# Altium PCB PCB1.PcbDoc
Units mil, origin at the board's own origin, x right, y up, seen from the top; angles counter-clockwise.
Board outline 2015 x 2815 mil, 2 copper layers (Top Layer, Bottom Layer); 33 components, 27 nets, 109 pads, 9 vias.
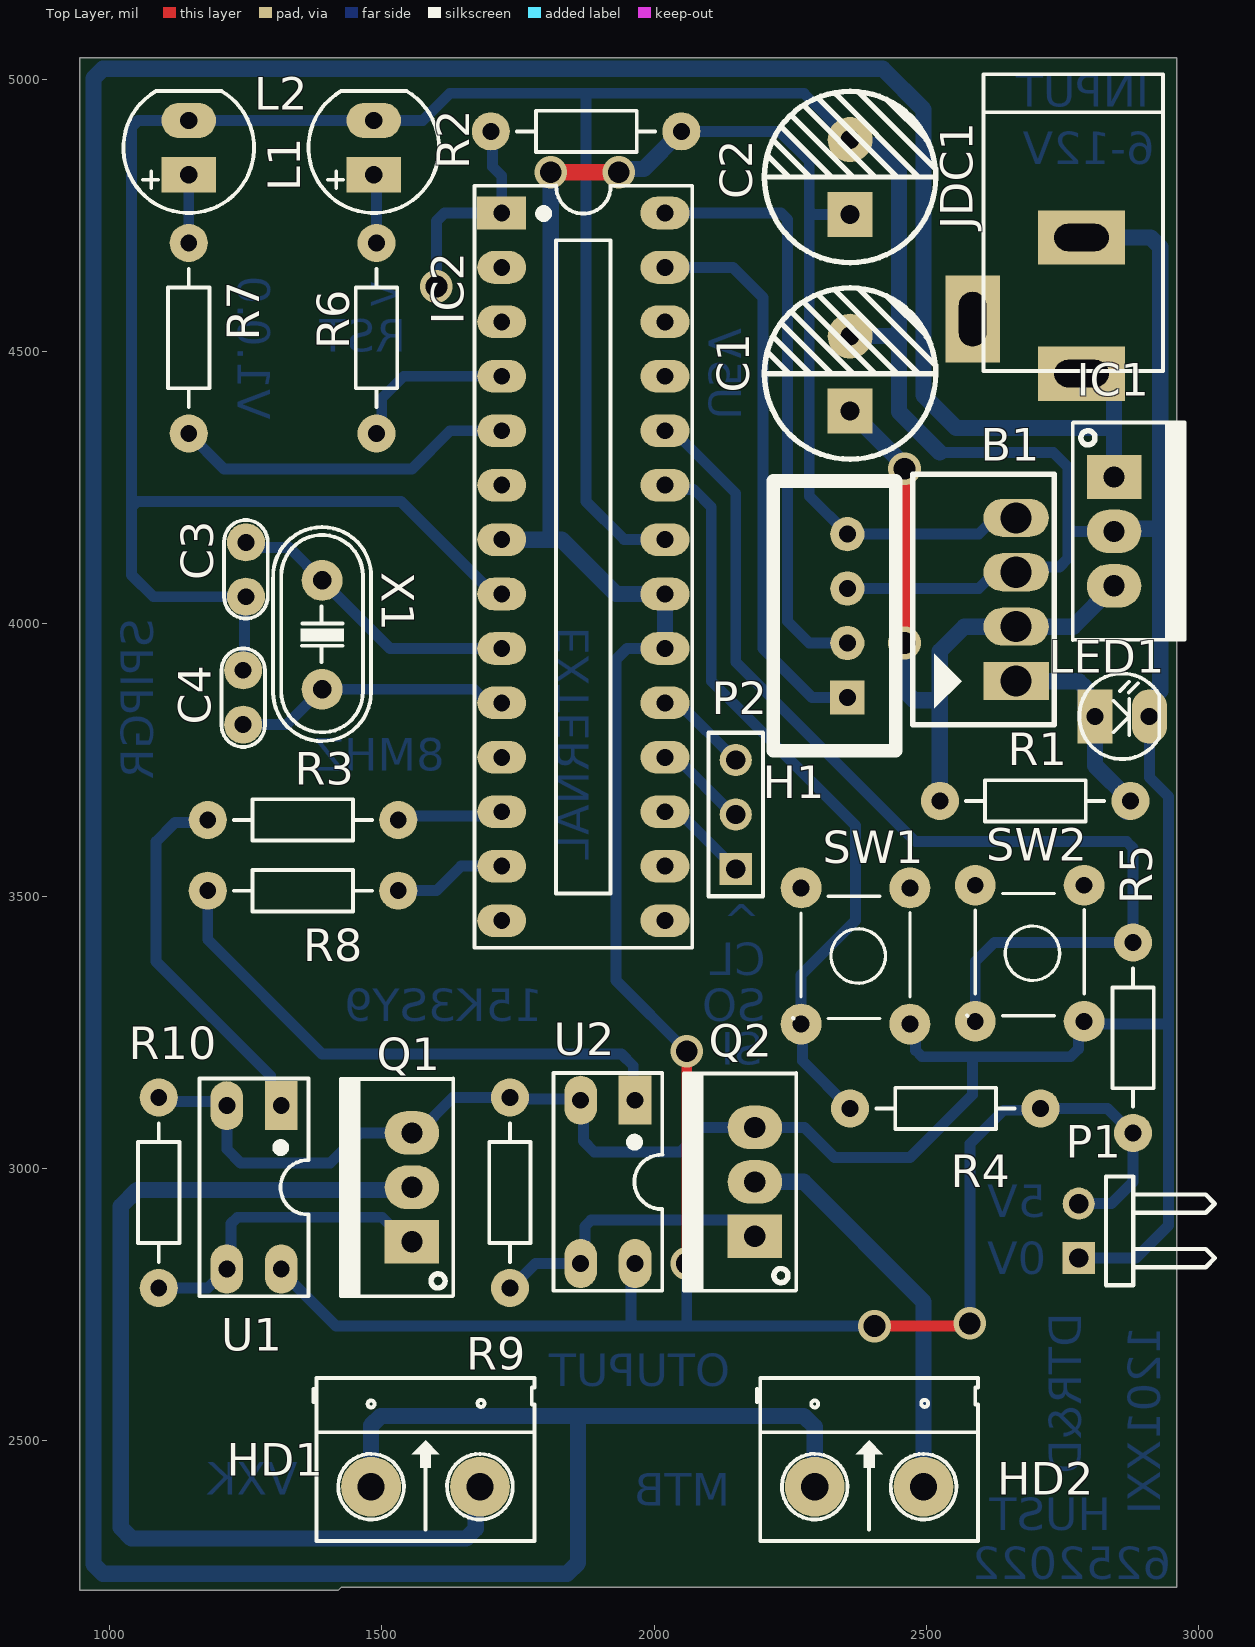
[diagram p0: Top Layer view]
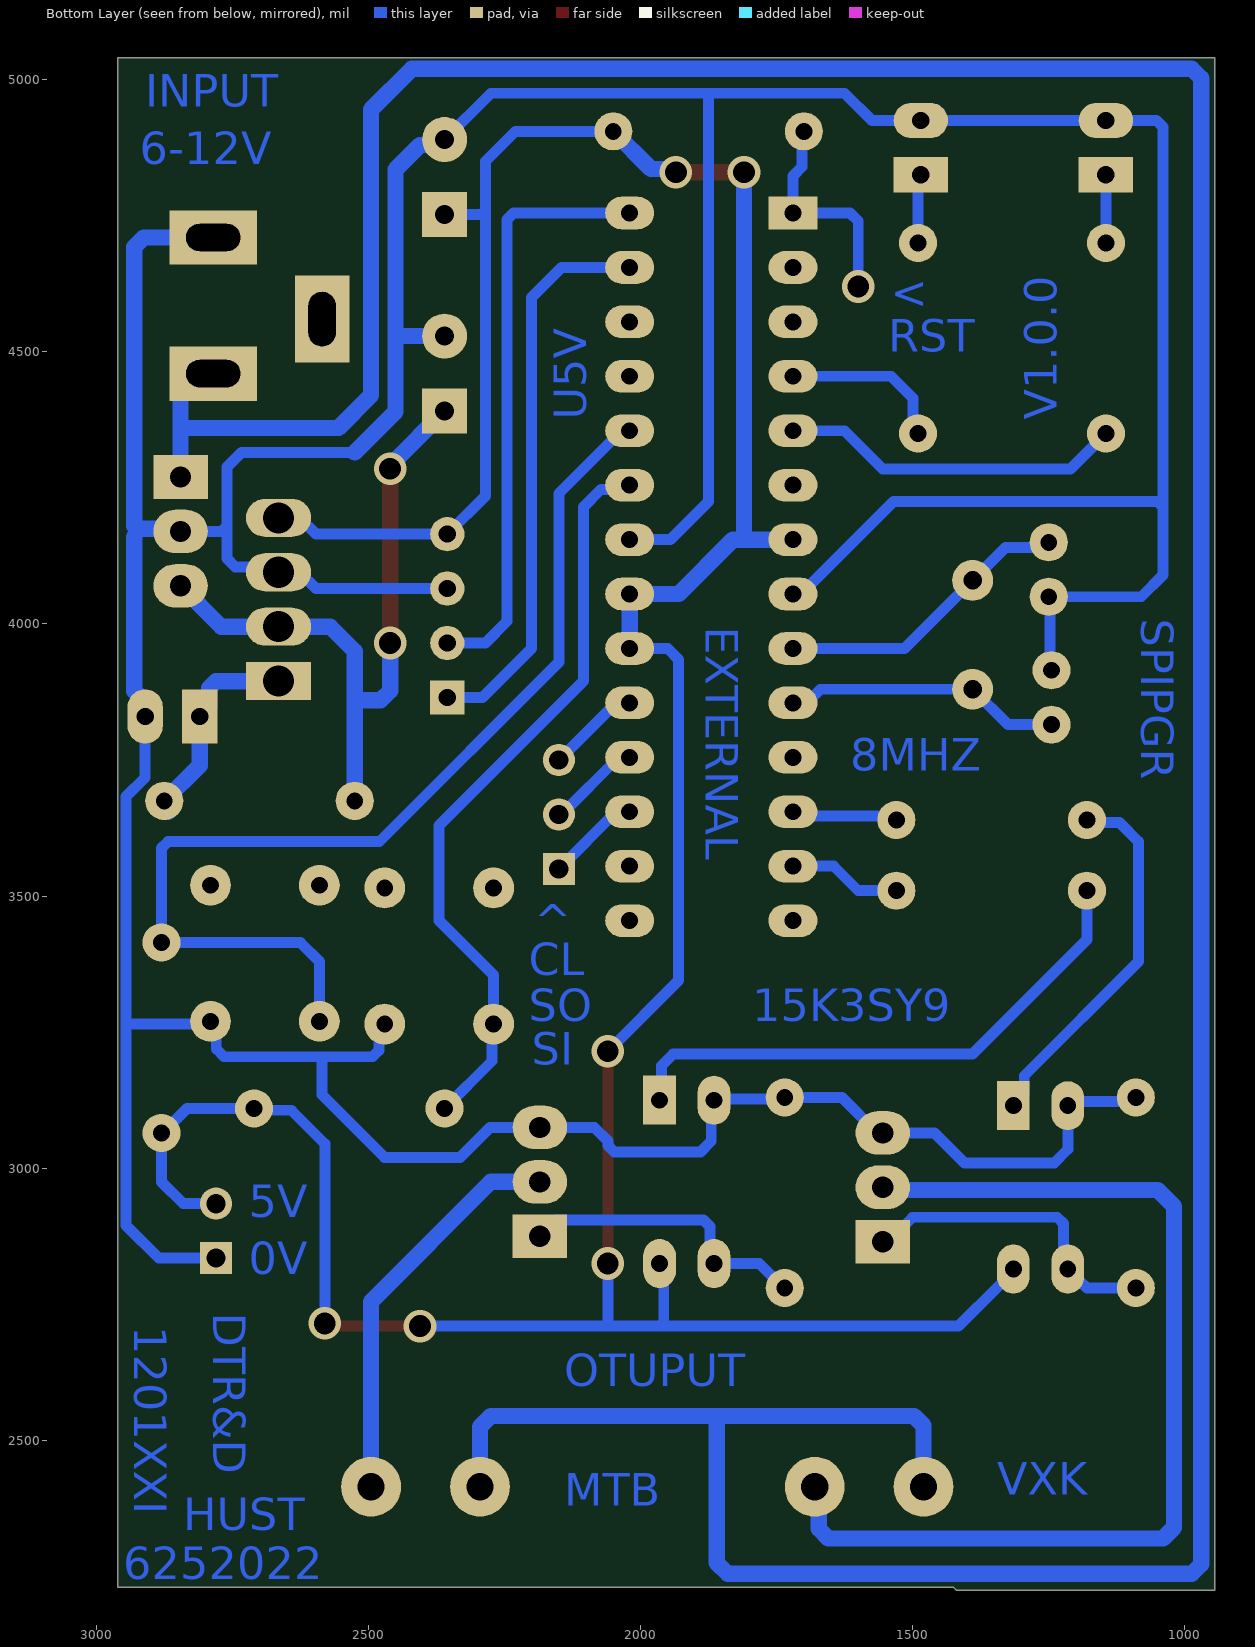
[diagram p1: Bottom Layer view, seen from below]
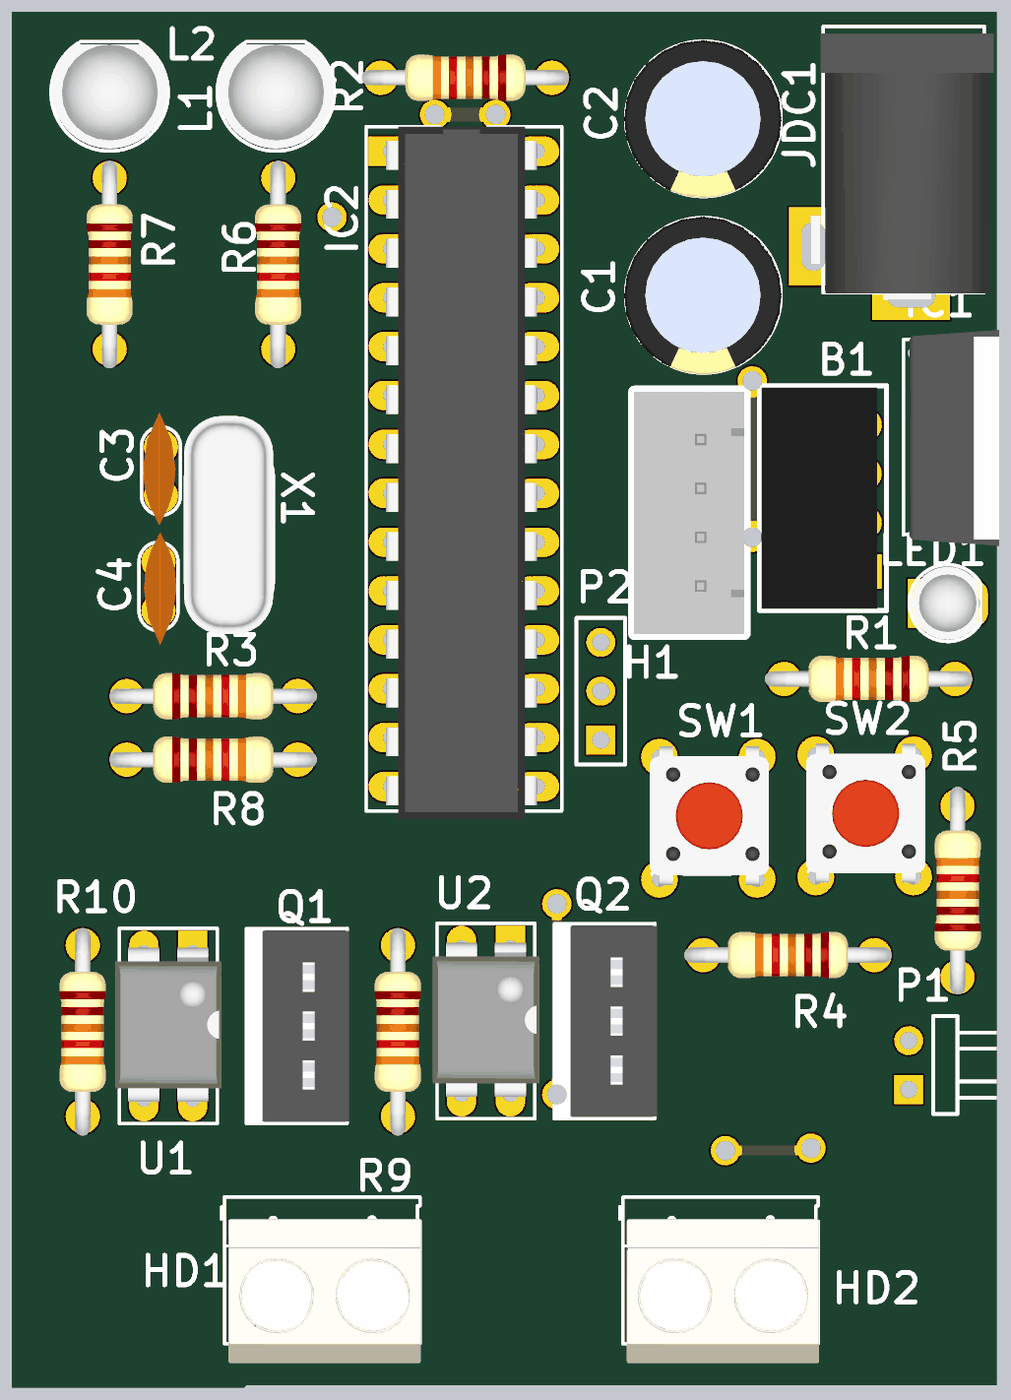
[diagram p2: 3D render of the assembled board from above, using the file's embedded part models]

## Layer stack, top to bottom
Top Solder: solder mask 0.4, Solder Resist, Dk 3.5
Top Layer: signal copper 1.4
Dielectric 1: dielectric 12.6, FR-4, Dk 4.8
Bottom Layer: signal copper 1.4
Bottom Solder: solder mask 0.4, Solder Resist, Dk 3.5

## Board outline
945,5040 2960,5040 2960,2230 1425,2230 1420,2225 945,2225

## Design rules (kind name [scope] priority, off if disabled: settings)
Clearance [All] p1: gap=10 ignorepadtopadclearanceinfootprint=FALSE except(0: Arc-Hole Track-Hole SMDPad-Hole THPad-Hole Via-Hole Fill-Hole Poly-Hole Region-Hole Text-Hole)
PolygonConnect [All] p1: connectstyle=Relief reliefconductorwidth=10 reliefentries=4 polygonreliefangle="90 Angle" airgapwidth=10
RoomDefinition Sheet2 [InComponentClass('Sheet2')] p1: confinementstyle=ConfineIn formatcopy=TRUE lockcomponents=FALSE outline 7045,1060 15470,1060 15470,2595 7045,2595
RoutingVias [All] p1: holewidth=28 width=50 viastyle="Through Hole" minholewidth=28 minwidth=50 maxholewidth=28 maxwidth=50
SolderMaskExpansion [All] p1: expansion=4 istentingtop=FALSE
Width [All] p1: maxlimit=30 minlimit=10 preferedwidth=20
30 further rules are at their usual default settings.

## Components (designator, comment, footprint, x,y, rotation, side; value= is the part's Value field where it differs from the comment)
B1 "B0505S" B0505S 2665,3895 r90 top
C1 "100uF" "tu hoa 8mm" 2360,4460 r90 top
C2 "100uF" "tu hoa 8mm" 2360,4821.1 r90 top
C3 "22pF" CN1 1250,4050 r90 top value=100pF
C4 "22pF" CN1 1245,3915 r270 top value=100pF
H1 "BMP170" XH2.54M-4 2355,3865 r90 top
HD1 "Header 2" HED2 1480,2415 r0 top
HD2 "Header 2" HED2 2295,2415 r0 top
IC1 "LM7805" QTO-220 2845,4270 r270 top
IC2 "ATmega8-L" DIP28/W0.3 1720,4755 r270 top
JDC1 "Jac DC" DC-IN 2685,4585 r270 top
L1 "LED 5mm" LED-5MM-RED 1485,4825 r90 top
L2 "LED 5mm" LED-5MM-RED 1145,4825 r90 top
LED1 "LED" LED-3 2810,3830 r0 top value="LED 3 ly Single Colour"
P1 "Header 2H" HDR1X2H 2780,2835 r90 top
P2 "Header 3" HDR1X3 2150,3550 r90 top
Q1 "IRF3709" TO220 1555,2865 r90 top
Q2 "IRF3709" TO220 2185,2875 r90 top
R1 "220R" R1/4W 2525,3675 r0 top value="R1/4W - 1K"
R2 "10K" R1/4W 1700,4905 r0 top value="R1/4W - 1K"
R3 "220R" R1/4W 1530,3640 r180 top value="R1/4W - 1K"
R4 "1k" R1/4W 2360,3110 r0 top value="R1/4W - 1K"
R5 "1k" R1/4W 2880,3415 r270 top value="R1/4W - 1K"
R6 "220R" R1/4W 1490,4350 r90 top value="R1/4W - 1K"
R7 "220R" R1/4W 1145,4350 r90 top value="R1/4W - 1K"
R8 "220R" R1/4W 1530,3510 r180 top value="R1/4W - 1K"
R9 "4k7" R1/4W 1735,2780 r90 top value="R1/4W - 1K"
R10 "4k7" R1/4W 1090,2780 r90 top value="R1/4W - 1K"
SW1 "SW" SW4 2470,3515 r270 top value="Button chip 4 pin"
SW2 "SW" SW4 2790,3520 r270 top value="Button chip 4 pin"
U1 "PC817" DIP4/W0.3 1315,3115 r180 top
U2 "PC817" DIP4/W0.3 1965,3125 r180 top
X1 "8Mhz" XT2 1390,3980 r270 top value=4Mhz

## Footprints (in the part's own frame and the unit in brackets; to place one, negate y for a bottom-side part, rotate by r counter-clockwise, add the part's x,y. Pads: shape width x height; smd on the part's side, far side on the other; paste and mask are expansions set on the pad)
B0505S [mil]
  rect 70x120 hole 57: 1(0,0)
  oval 70x120 hole 57: 2(100,0) 3(200,0) 4(300,0)
  silkscreen extent -80,-70 380,190, body extent -76,-50 376,186, height 394
CN1 [mil]
  round 70 hole 31: 1(0,0) 2(100,0)
  silkscreen extent -40,-40 141,40, body extent -60,-30 170,37, height 265
DC-IN [mil] "Jac DC input"
  rect 100x160 hole 50 slot 100 at 90 deg: 1(125,100) 2(-125,100)
  rect 160x100 hole 50 slot 100 at 0 deg: 3(25,-100)
  silkscreen extent -425,-80 120,250, body extent -410,-105 134,269, height 434
DIP4/W0.3 [mil] "4 PIN, W 300mil, Pin to pin 100mil"
  rect 60x90 hole 31: 1(0,0)
  oval 60x90 hole 31: 2(100,0) 3(100,300) 4(0,300)
  silkscreen extent -50,-50 150,350, body extent -59,-10 159,305, height 170
DIP28/W0.3 [mil] "28 PIN, W 300mil, Pin to pin 100mil"
  rect 60x90 hole 31: 1(0,0)
  oval 60x90 hole 31: 2(100,0) 3(200,0) 4(300,0) 5(400,0) 6(500,0) 7(600,0) 8(700,0) 9(800,0) 10(900,0) 11(1000,0) 12(1100,0) 13(1200,0) 14(1300,0) 15(1300,300) 16(1200,300) 17(1100,300) 18(1000,300) 19(900,300) 20(800,300) 21(700,300) 22(600,300) 23(500,300) 24(400,300) 25(300,300) 26(200,300) 27(100,300) 28(0,300)
  silkscreen extent -50,-50 1350,350, body extent -50,-10 1367,300, height 200
HDR1X2H [mm] "Connector; Header; 2 Position; Right Angle"
  rect 1.5x1.5 hole 0.9: 1(0,0)
  round 1.5 hole 0.9: 2(2.54,0)
  silkscreen extent -1.27,-6.35 3.81,-1.27
HDR1X3 [mm] "Connector; Header; 3 Position"
  rect 1.5x1.5 hole 0.9: 1(0,0)
  round 1.5 hole 0.9: 2(2.54,0) 3(5.08,0)
  silkscreen extent -1.27,-1.27 6.35,1.27
HED2 [mil] "Header 2, 2 pin, hight 300mil, Pin to Pin 200, Colour Green"
  round 110 hole 50: 1(0,0) 2(200,0)
  silkscreen extent -106,-100 300,200, body extent -92,-140 302,155, height 394
LED-3 [mil] "LED 2 PIN, 3ly Only colour"
  rect 65x100 hole 32: 1(0,0)
  oval 65x100 hole 32: 2(100,0)
  silkscreen extent -29,-78 118,79, body extent -25,-75 113,75, height 217
LED-5MM-RED [mil] "LED 2 PIN, 5 ly , Only colour,pin to pin 100mil"
  rect 65x100 hole 32: 1(0,0)
  oval 65x100 hole 32: 2(100,0)
  silkscreen extent -70,-120 154,120, body extent -65,-119 149,118, height 339
QTO-220 [mil] "TO-220 - 1-2-3"
  rect 80x100 hole 39: 1(0,0)
  oval 80x100 hole 39: 2(100,0) 3(200,0)
  silkscreen extent -100,-76 300,130, body extent -119,-64 322,121, height 755
R1/4W [mil] "R 1/4W, 2 Pin, 350mil"
  round 70 hole 31: 1(0,0) 2(350,0)
  silkscreen extent 48,-38 302,38, body extent -40,-47 386,47, height 111
SW4 [mil] "SW button 4pin, 250 x250 mil"
  round 75 hole 31: 1(0,0) 2(250,-200) 3(250,0) 4(0,-200)
  silkscreen extent 15,-215 240,0, body extent -36,-220 276,24, height 276
TO220 [mil] "TO-220"
  rect 80x100 hole 39: 1(0,0)
  oval 80x100 hole 39: 2(100,0) 3(200,0)
  silkscreen extent -100,-76 300,130, body extent -95,-80 295,97, height 323
"tu hoa 8mm" [mm]
  rect 2.1x2.1 hole 0.9: 1(-1.75,0)
  round 2.1 hole 0.9: 2(1.75,0)
  silkscreen extent -4,-4 4,4, body extent -4.1,-4.07 4.1,4.13, height 13.81
XH2.54M-4 [mm]
  rect 1.6x1.6 hole 0.8: 1(0,0)
  round 1.6 hole 0.8: 2(2.54,0) 3(5.08,0) 4(7.62,0)
  silkscreen extent -2.48,-2.26 10.1,3.46, body extent -2.48,-2.26 10.1,3.48, height 6.91
XT2 [mil] "Footpin for Crystal 2 pin"
  round 75 hole 34: 1(-100,0) 2(100,0)
  silkscreen extent -198,-90 195,90, body extent -233,-93 213,90, height 138

## Part data
B1: "Cắm", Chung_Loai=Cắm, Don_Vi=Con, Ma_Hang=MH003143, Ten_Linh_Kien="B0505S-1W SIP4 IC Converter DC-DC"
C1 C2: library part "Tu Hoa 100uF 35V 8x11", "Cắm", Chung_Loai=Cắm, Don_Vi=Con, Ma_Hang=MH002807, So_Chan=2, Ten_Linh_Kien="Tụ Hóa 100uF 35V 8x11MM"
C3 C4: library part CN1, "Cap np  1pF - 472pF"
H1: library part "Header 4P 2.54 Duc Thang", "Cắm", Chung_Loai=Cắm, Don_Vi=Con, Ma_Hang=MH001285, Ten_Linh_Kien="Header 4P XH2.54-4P Đực Thẳng"
HD1 HD2: library part Hed2, "Header 2 (Green)"
IC1: library part LM78xx, "On ap +, from + 5 to + 24VDC"
IC2: "8-Bit AVR Microcontroller with 8K Bytes of In-System Programmable Flash Memory"
JDC1: library part DCIN, "Jac DC input"
L1 L2: library part "LED 5mm Do", "Cắm", Chung_Loai=Cắm, Don_Vi=Con, Ma_Hang=MH008967, Ten_Linh_Kien="Led 5MM Phủ Đỏ (1000c)"
LED1: "LED Single colour Green and Red"
P1: "Header, 2-Pin, Right Angle", LatestRevisionDate=17-Jul-2002, LatestRevisionNote="Re-released for DXP Platform.", Publisher="Altium Limited"
P2: "Header, 3-Pin", LatestRevisionDate=17-Jul-2002, LatestRevisionNote="Re-released for DXP Platform.", Publisher="Altium Limited"
Q1 Q2: library part "IRF3709 DIP", "N-Channel Power MOSFET"
R1 R2 R3 R4 R5 R6 R7 R8 R9 R10: library part R1/4W, "Resistor 1/4W"
SW1 SW2: library part SW4, "Switch button 4 pin"
U1 U2: "Single Opto"
X1: library part XT2, "Crystal For all Crystal 2pin."

## Via types
v1: diameter 60, hole 40, Top Layer to Bottom Layer, 9 vias

## Nets (pads, with @x,y where several pads share a name; then routed paths per layer and width w, separated by ;. In a path a pad name is that pad's centre, name@x,y a point inside that pad or via, vN(x,y) a via of type N, cw(c..) or ccw(c..) an arc to the next point about the centre after c; other vN are vias at no path point)
+5: B1.4 C2.1 H1.4 IC2.7 IC2.20 IC2.21 P1.2 R2.2 R4.2 R5.2 U1.4 U2.4 | length 6457
  Top Layer w20: v1(2060,2825) v1(2060,3215) ; v1(2405,2710) 2565,2710 2570,2715 v1(2580,2715)
  Top Layer w30: v1(1810,4830) v1(1935,4830)
  Bottom Layer w20: U1.4 1315,2810.82 1342.84,2782.99 1415.82,2710 1965,2710 ; U2.4 1957.35,2817.35 1957.35,2717.65 1965,2710 ; IC2.20 1950,3955 1930,3935 1930,3345 v1(2060,3215) ; R2.2 2230,4905 2285,4850 2285,4760 ; v1(2060,2825) 2060,2710 ; C2.1@2357.58,4754.62 C2.1 2292.8,4752.2 2285,4760 ; v1(2405,2710) 2060,2710 ; v1(2580,2715) 2580,3045 2641.54,3106.54 2706.54,3106.54 R4.2 2833.08,3110 2878.08,3065 R5.2 2880,2975 2840,2935 P1.2 ; B1.4 2626.47,4195 2596.47,4165 H1.4 2285,4235 2285,4760 ; 1965,2710 2060,2710
  Bottom Layer w30: IC2.7 1810,4155 ; v1(1810,4830) 1810,4155 ; v1(1935,4830) 1940.74,4835.74 1980.74,4835.74 R2.2 ; IC2.20 IC2.21 1930,4055 1830,4155 1810,4155
+12: HD1.1 HD2.1 IC1.1 JDC1.1 | length 7651.1
  Bottom Layer w30: HD1.1 1480,2527.43 1497.57,2545 1860,2545 ; HD2.1 2295,2525 2275,2545 1860,2545 ; JDC1.1 2810,4460 2845,4425 2845,4360 ; IC1.1 2845,4360 ; 1860,2545 1860,2275 1840,2255 987.57,2255 970,2272.57 970,5002.43 987.57,5020 2420,5020 2495,4945 2495,4420 2555,4360 2845,4360
GND: B1.3 C1.2 C2.2 C3.1 C4.1 H1.3 IC1.2 IC2.8 IC2.22 JDC1.2 L1.2 L2.2 LED1.2 P1.1 Q1.3 Q2.3 R9.2 R10.2 SW1.3 SW2.3 U1.2 U2.2 | length 10718.1
  Bottom Layer w20: R10.2 1097.5,3122.5 1207.5,3122.5 U1.2 1215,3035 1240,3010 1405,3010 1460,3065 1565,3065 1630,3130 R9.2 1737.5,3127.5 1862.5,3127.5 U2.2 1870,3120 1870,3050 1890,3030 2048.28,3030 2060,3041.72 2060,3050 2085,3075 Q2.3 2276.36,3075 2331.36,3020 2470,3020 2585,3135 2585,3200 2580,3205 ; C4.1 1247.5,3917.5 1247.5,4047.5 C3.1 1080,4050 1040,4090 1040,4215 ; IC2.8 1705,4055 1535,4225 1050,4225 1040,4215 ; IC2.22 1945,4155 1875,4225 1875,4975 ; H1.3 2596.47,4065 2626.47,4095 B1.3 2674.57,4104.57 2744.57,4104.57 2760,4120 2760,4180 ; C2.2 2275,4975 1875,4975 ; SW1.3 2480.52,3254.48 2480.52,3216.72 2492.24,3205 2580,3205 ; 2525,4315 2733.28,4315 2760,4288.28 2760,4180 ; P1.1 2885,2835 2945,2895 2945,3260 ; LED1.2 2910,3717.78 2945,3682.78 2945,3260 ; 2930,4160 2920,4170 IC1.2 ; 2930,4180 2855,4180 IC1.2 ; 1040,4215 1040,4913.28 1051.72,4925 L2.2 L1.2 1575,4925 1625,4975 1875,4975 ; 2580,3205 2765,3205 2779.48,3219.48 2779.48,3259.48 SW2.3 2795,3265 2940,3265 2945,3260 ; 2760,4180 2770,4170 IC1.2
  Bottom Layer w30: C1.2 2450,4528.9 ; C2.2 2370.08,4879.92 2405.08,4879.92 2450,4835 2450,4528.9 ; 2525,4315 2450,4390 2450,4528.9 ; JDC1.2 2912.43,4710 2930,4692.43 2930,4180 ; LED1.2 2910,3856.97 2930,3876.97 2930,4160
NetB1_1: B1.1 LED1.1 R1.2 | length 397.7
  Bottom Layer w30: B1.1 2780,3895 2792.5,3882.5 2792.5,3847.5 LED1.1 2810,3740 R1.2 2867.35,3667.35 R1.2@2867.35,3654.85
NetB1_2: B1.2 C1.1 IC1.3 R1.1 | length 1286.9
  Top Layer w30: v1(2460,3965) v1(2460,4285)
  Bottom Layer w30: C1.1 2456.17,4294.93 2456.17,4288.83 v1(2460,4285) ; v1@2465,3965 v1(2460,3965) 2460,3877.57 2477.57,3860 2525,3860 ; R1.1 2525,3860 ; IC1.3@2835,4070 IC1.3 2770,3995 B1.2 2570,3995 2525,3950 2525,3860
NetC3_2: C3.2 IC2.9 X1.1 | length 550.8
  Bottom Layer w20: C3.2 1259.57,4140.43 1329.57,4140.43 X1.1 1515,3955 IC2.9
NetC4_2: C4.2 IC2.10 X1.2 | length 512.3
  Bottom Layer w20: C4.2 1325,3815 X1.2 1669.18,3880 1694.18,3855 IC2.10
NetH1_1: H1.1 IC2.27 | length 1040.1
  Bottom Layer w20: IC2.27 2145,4655 2200,4600 2200,3955 2290,3865 H1.1
NetH1_2: H1.2 IC2.28 | length 1094.7
  Bottom Layer w20: IC2.28 2233.28,4755 2245,4743.28 2245,4005 2285,3965 H1.2
NetHD1_2: HD1.2 Q1.2 | length 1888.1
  Bottom Layer w30: Q1.2 1550,2960 1050,2960 1020,2930 1020,2340 1040,2320 1654.87,2320 1672.45,2337.57 1672.45,2407.45 HD1.2
NetHD2_2: HD2.2 Q2.2 | length 741.1
  Bottom Layer w30: Q2.2 2275,2975 2495,2755 HD2.2
NetIC2_1: IC2.1 R2.1 | length 404.5
  Bottom Layer w20: v1(1600,4620) 1600,4740 1615,4755 IC2.1 1720,4823.23 1703.23,4840 1703.23,4901.77 R2.1
NetIC2_4: IC2.4 R6.1 | length 305.7
  Bottom Layer w20: R6.1 1499.57,4359.57 1499.57,4414.57 1540,4455 IC2.4
NetIC2_5: IC2.5 R7.1 | length 630.9
  Bottom Layer w20: R7.1 1210,4285 1555,4285 1625,4355 IC2.5
NetIC2_12: IC2.12 R3.1 | length 196.2
  Bottom Layer w20: R3.1 1537.5,3647.5 1712.5,3647.5 IC2.12
NetIC2_13: IC2.13 R8.1 | length 208.6
  Bottom Layer w20: R8.1 1600,3510 1645,3555 IC2.13
NetIC2_17: IC2.17 P2.1 | length 173.5
  Bottom Layer w20: IC2.17 2045,3655 P2.1
NetIC2_18: IC2.18 P2.2 | length 173.5
  Bottom Layer w20: IC2.18 2040,3755 2145,3650 P2.2
NetIC2_19: IC2.19 P2.3 | length 173.5
  Bottom Layer w20: IC2.19 2045,3855 P2.3
NetIC2_23: IC2.23 R4.1 SW1.2 | length 1395
  Bottom Layer w20: IC2.23 2027.65,4247.35 2072.65,4247.35 2105,4215 2105,3895 2370,3630 2370,3455 2270,3355 SW1.2 2272.5,3262.5 2272.5,3197.5 R4.1
NetIC2_24: IC2.24 R5.1 SW2.2 | length 1947
  Bottom Layer w20: IC2.24 2035,4355 2150,4240 2150,3930 2480,3600 2868.28,3600 2880,3588.28 R5.1 2625,3415 2590,3380 SW2.2
NetL1_1: L1.1 R6.2 | length 127.1
  Bottom Layer w20: L1.1 1490,4820 R6.2
NetL2_1: L2.1 R7.2 | length 125
  Bottom Layer w20: R7.2 L2.1
NetQ1_1: Q1.1 R10.1 U1.3 | length 584.2
  Bottom Layer w20: R10.1 1180,2780 1192.35,2792.35 1196.52,2792.35 1215,2810.82 U1.3 1222.65,2822.65 1222.65,2898.28 1234.37,2910 1500,2910 1545,2865 Q1.1
NetQ2_1: Q2.1 R9.1 U2.3 | length 549.7
  Bottom Layer w20: R9.1 1736.92,2780 1781.92,2825 U2.3 1872.65,2832.65 1872.65,2893.28 1884.37,2905 2155,2905 Q2.1
NetR3_2: R3.2 U1.1 | length 691.8
  Bottom Layer w20: R3.2 1175,3635 1120,3635 1085,3600 1085,3380 1295,3170 1295,3135 U1.1
NetR8_2: R8.2 U2.1 | length 1032.3
  Bottom Layer w20: R8.2 1180,3420 1390,3210 1940,3210 1961.72,3188.28 1961.72,3128.28 U2.1
pads on no net: IC2.2 IC2.3 IC2.6 IC2.11 IC2.14 IC2.15 IC2.16 IC2.25 IC2.26 JDC1.3 SW1.1 SW1.4 SW2.1 SW2.4

## Other copper
Bottom Layer:
  text "INPUT" at 2910,4950 h60
  text "6-12V" at 2920,4845 h60
  text "<" at 1540,4580 h60
  text "RST" at 1545,4500 h60
  text "V1.0.0" at 1235,4375 h60 r270
  text "U5V" at 2100,4375 h60 r270
  text "SPIPGR" at 1080,4010 h60 r90
  text "EXTERNAL" at 1880,3995 h60 r90
  text "8MHZ" at 1615,3730 h60
  text "^" at 2195,3425.01 h60
  text "CL" at 2205,3355 h60
  text "15K3SY9" at 1795,3270 h60
  text "SO" at 2205,3270 h60
  text "SI" at 2200,3190 h60
  text "5V" at 2720,2910 h60
  text "0V" at 2720,2805 h60
  text "DTR&D" at 2785,2735 h60 r90
  text "1201XXI" at 2930,2710 h60 r90
  text "OTUPUT" at 2140,2600 h60
  text "VXK" at 1345,2400 h60
  text "MTB" at 2140,2380 h60
  text "HUST" at 2840,2335 h60
  text "6252022" at 2950,2245 h60